# EAGLE board untitled (EAGLE 9.4.2)
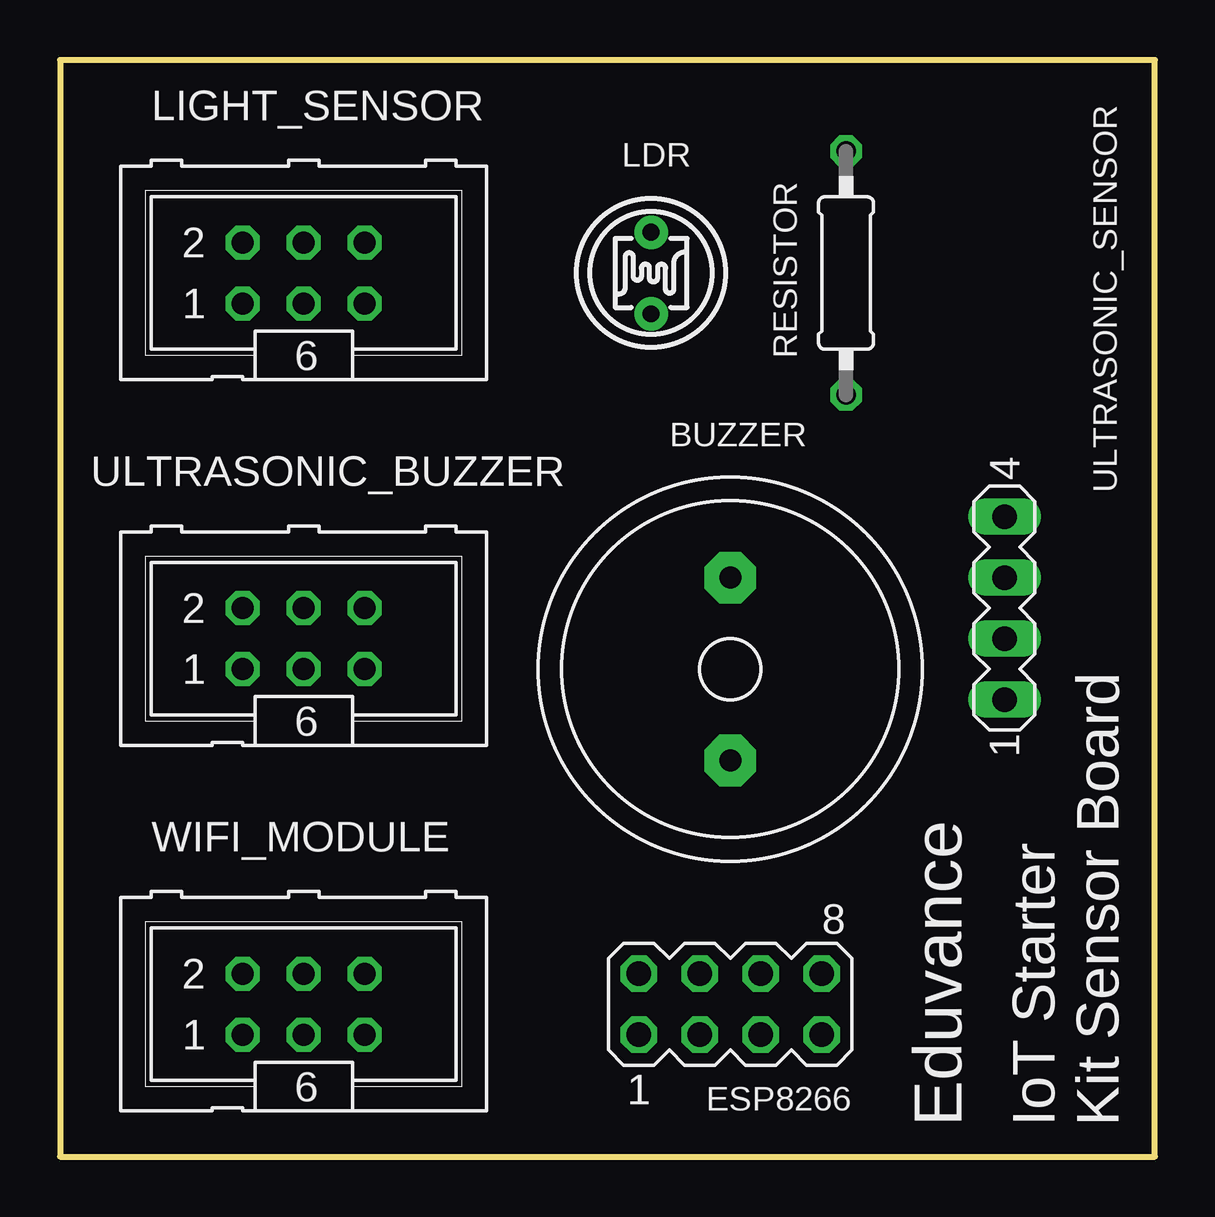
[diagram p0: board, top side]
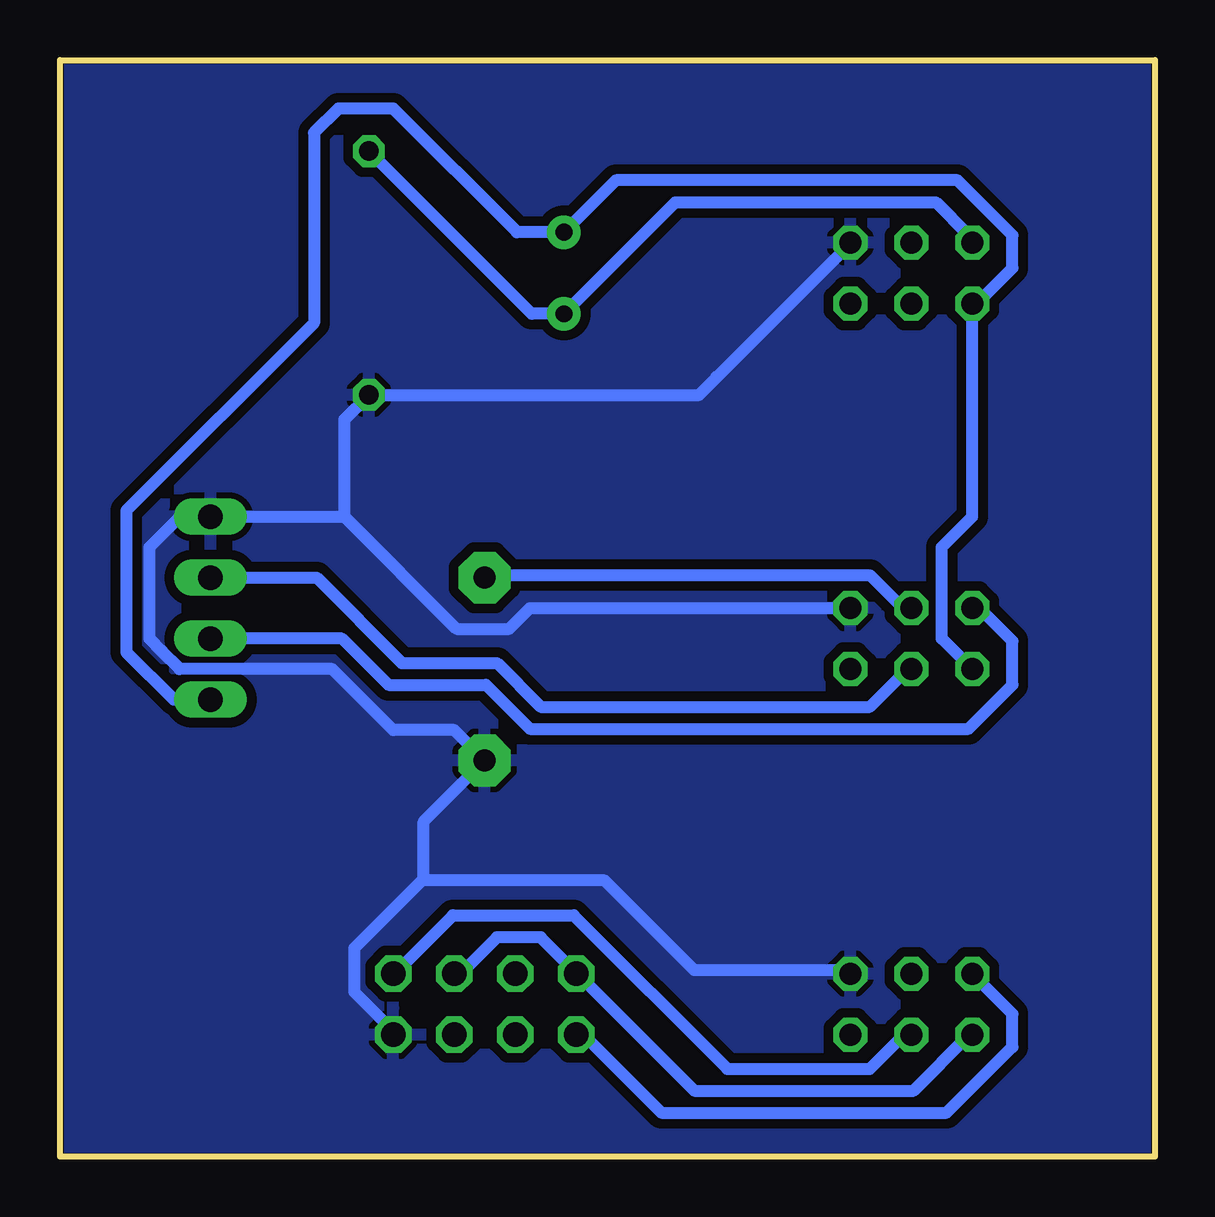
[diagram p1: board, bottom side, seen from below]

Size 45.64 x 45.71 mm. Coordinates in mm from the lower left corner, seen from the top.
Outline: 0,0 45.64,0 45.64,45.71 0,45.71 0,0
Copper layers (1*16): Top 0.035mm / dielectric 1.5mm / Bottom 0.035mm
Design rules "default *": minimum track width 20mil, minimum drill 0.35mm, track to track 16mil, track to pad 16mil, pad to pad 16mil, via to via 16mil, smd to smd 16mil, copper to edge 1mil, drill to drill 6mil, minimum pad ring 10mil, minimum via ring 8mil, stop-mask expansion 4mil, vias tented up to drill 0mil, thermal gap 10mil

## Footprints (pad centres in the part's own frame; a part is rotated, then mirrored left to right if it is on the bottom)
F/QMB = drill 0.914 pad 2.159 octagon: + 3.81,0; - -3.81,0
MA04-2 = drill 1.016 octagon: 1 -3.81,-1.27; 2 -3.81,1.27; 3 -1.27,-1.27; 4 -1.27,1.27; 5 1.27,-1.27; 6 1.27,1.27; 7 3.81,-1.27; 8 3.81,1.27
T0-46-A10XX = drill 0.7 pad 1.4: 1 -1.7,0; 2 1.7,0
ML6 = drill 0.914 octagon: 1 -2.54,-1.27; 2 -2.54,1.27; 3 0,-1.27; 4 0,1.27; 5 2.54,-1.27; 6 2.54,1.27
0207/10 = drill 0.813 octagon: 1 -5.08,0; 2 5.08,0
MA04-1 = drill 1.016 long: 1 -3.81,0; 2 -1.27,0; 3 1.27,0; 4 3.81,0

## Placement (x,y rotation side)
BUZZER  BUZZER  [F/QMB]  27.94,20.32 90 top
ESP8266  [MA04-2]  27.94,6.35 0 top
LDR  [T0-46-A10XX]  24.64,36.83 270 top
LIGHT_SENSOR  [ML6]  10.16,36.83 0 top
RESISTOR  [0207/10]  32.77,36.83 90 top
ULTRASONIC_BUZZER  [ML6]  10.16,21.59 0 top
ULTRASONIC_SENSOR  [MA04-1]  39.37,22.86 90 top
WIFI_MODULE  [ML6]  10.16,6.35 0 top

## Library data of the parts
BUZZER = buzzer; OC_FARNELL: unknown; OC_NEWARK: unknown
ESP8266 ULTRASONIC_SENSOR = con-lstb; OC_FARNELL: unknown; OC_NEWARK: unknown
LDR = photo-elements
LIGHT_SENSOR ULTRASONIC_BUZZER WIFI_MODULE = con-harting-ml; OC_FARNELL: unknown; OC_NEWARK: unknown
RESISTOR = rcl; SPICEPREFIX: R

## Nets
3V3: ESP8266.2 ESP8266.6 WIFI_MODULE.1
5V: LDR.1 LIGHT_SENSOR.1 ULTRASONIC_BUZZER.1 ULTRASONIC_SENSOR.1
BUZ: BUZZER.+ ULTRASONIC_BUZZER.4
ECHO: ULTRASONIC_BUZZER.3 ULTRASONIC_SENSOR.3
GND: BUZZER.- ESP8266.7 LIGHT_SENSOR.6 RESISTOR.1 ULTRASONIC_BUZZER.6 ULTRASONIC_SENSOR.4 WIFI_MODULE.6
RX: ESP8266.1 WIFI_MODULE.2
SG: LDR.2 LIGHT_SENSOR.2 RESISTOR.2
TRIG: ULTRASONIC_BUZZER.2 ULTRASONIC_SENSOR.2
TX: ESP8266.8 WIFI_MODULE.3

## Tracks (layer width: path | path; a pad name or v marks a point on that pad's centre or on a via)
3V3
  Bottom 0.508: WIFI_MODULE.1 7.77,5.03 10.06,2.74 19.2,2.74 23.77,7.32 ESP8266.2 24.23,7.77 25.6,9.14 27.43,9.14 28.8,7.77 ESP8266.6
5V
  Bottom 0.508: ULTRASONIC_SENSOR.1 40.89,19.05 42.88,21.03 42.88,26.92 35.05,34.75 35.05,42.67 34.04,43.69 31.75,43.69 26.59,38.53 LDR.1 22.48,40.69 8.23,40.69 5.94,38.41 5.94,37.03 7.32,35.66 LIGHT_SENSOR.1 7.62,26.67 8.89,25.4 8.89,21.59 ULTRASONIC_BUZZER.1
BUZ
  Bottom 0.508: ULTRASONIC_BUZZER.4 10.52,22.86 11.89,24.23 27.43,24.23 27.53,24.13 BUZZER.+
ECHO
  Bottom 0.508: ULTRASONIC_BUZZER.3 10.52,20.12 11.89,18.75 25.6,18.75 27.43,20.57 31.39,20.57 34.95,24.13 ULTRASONIC_SENSOR.3
GND
  Bottom 0.508: WIFI_MODULE.6 12.8,7.77 19.2,7.77 22.94,11.51 30.56,11.51 | 30.56,11.51 33.38,8.69 33.38,6.86 32,5.49 ESP8266.7 | 18.26,32.49 12.8,37.95 LIGHT_SENSOR.6 | ULTRASONIC_BUZZER.6 26.06,22.86 26.92,22 29.11,22 33.78,26.67 | 30.56,11.51 30.48,11.58 30.48,13.97 BUZZER.- 29.21,17.78 31.75,17.78 34.29,20.32 40.66,20.32 41.4,21.06 41.4,21.08 41.91,21.59 41.91,25.4 40.64,26.67 ULTRASONIC_SENSOR.4 33.78,26.67 | 18.29,32.51 18.26,32.49 | 18.26,32.49 19,31.75 RESISTOR.1 33.78,30.73 33.78,26.67
  pour Bottom: -1.27,46.99 46.99,46.99 46.99,0 46.99,-1.27 -1.27,-1.27
RX
  Bottom 0.508: WIFI_MODULE.2 5.94,5.94 5.94,4.57 8.69,1.83 20.57,1.83 23.77,5.03 ESP8266.1
SG
  Bottom 0.508: LIGHT_SENSOR.2 7.77,38.41 9.14,39.78 19.99,39.78 LDR.2 25.99,35.13 RESISTOR.2
TRIG
  Bottom 0.508: ULTRASONIC_BUZZER.2 7.32,22.86 5.94,21.49 5.94,19.66 7.77,17.83 26.06,17.83 27.89,19.66 31.95,19.66 33.88,21.59 ULTRASONIC_SENSOR.2
TX
  Bottom 0.508: WIFI_MODULE.3 10.52,5.03 11.89,3.66 17.83,3.66 24.23,10.06 29.26,10.06 31.55,7.77 ESP8266.8

## Text on the board
tNames: Eduvance | IoT Starter / Kit Sensor Board